# Altium PCB PCB2.PcbDoc (part 2 of 2)
Units mm, origin at the board's own origin, x right, y up, seen from the top; angles counter-clockwise.
Board outline 40 x 65 mm, 2 copper layers (Top Layer, Bottom Layer); 76 components, 45 nets, 266 pads, 528 vias.
Unrouted connection lines stored in the file: 3.
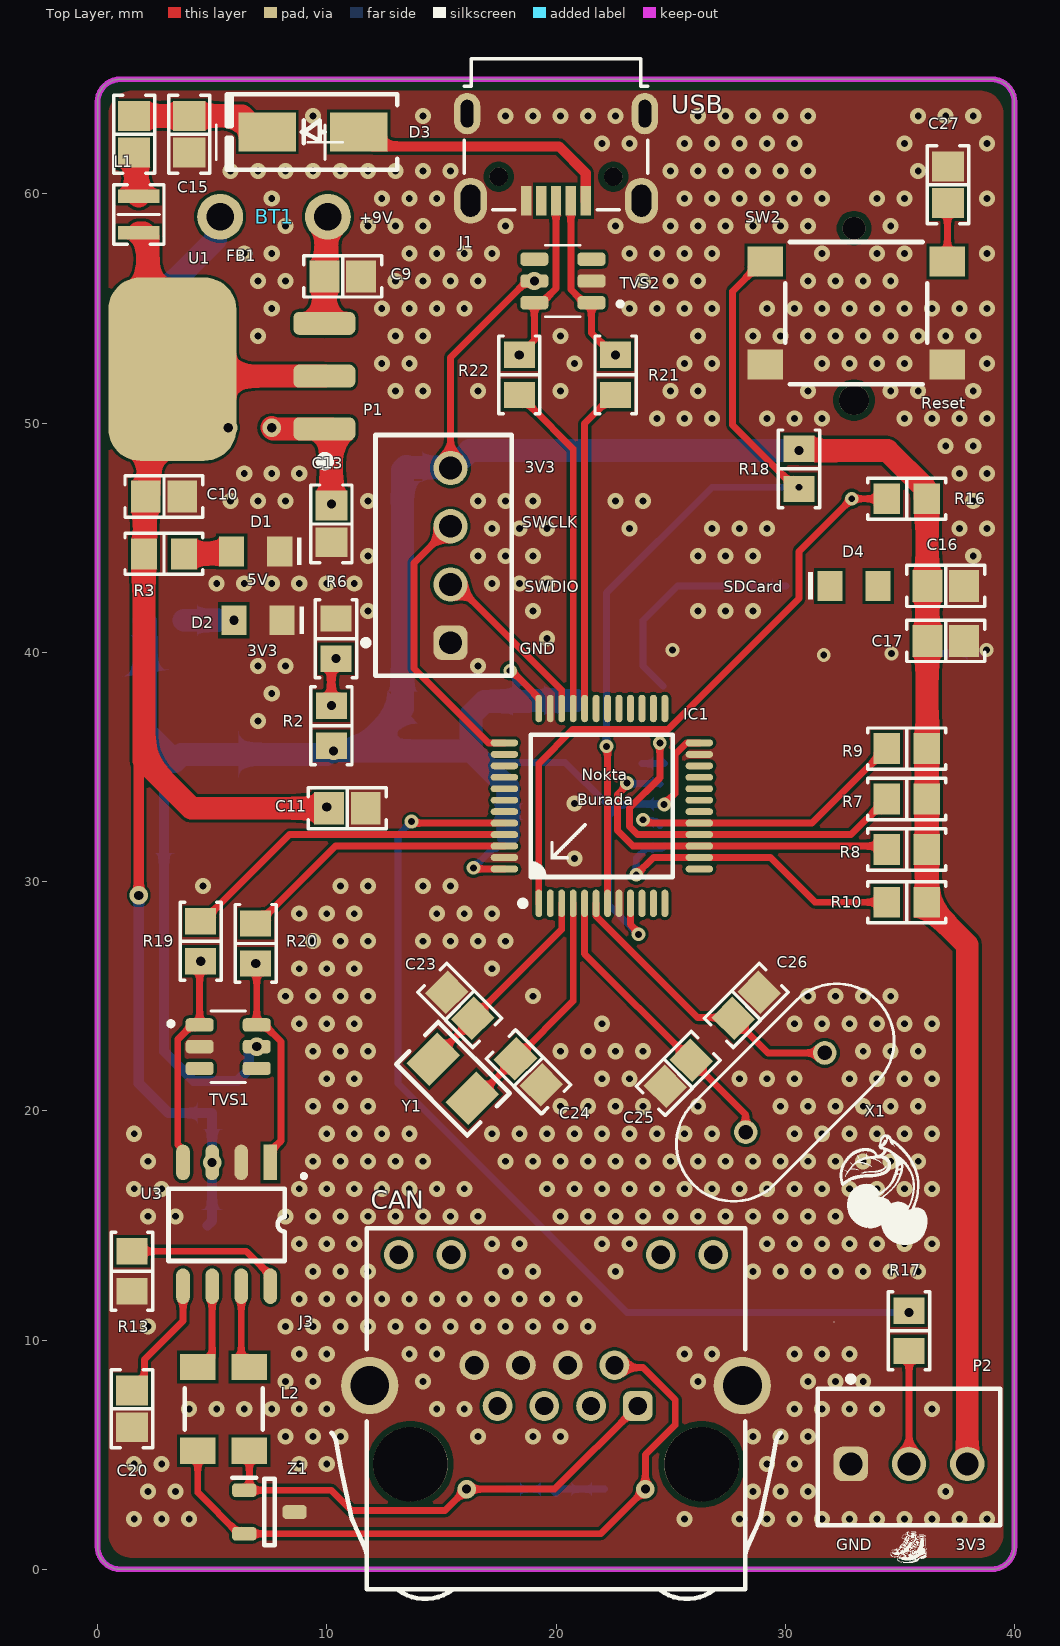
[diagram p0: Top Layer view]

## Via types
v1: diameter 0.7, hole 0.3, Top Layer to Bottom Layer, tented both sides, 492 vias
v2: diameter 0.8, hole 0.4, Top Layer to Bottom Layer, 15 vias
v3: diameter 0.6, hole 0.3, Top Layer to Bottom Layer, tented both sides, 8 vias
v4: diameter 0.6, hole 0.3, Top Layer to Bottom Layer, tented top, 5 vias
v5: diameter 0.8, hole 0.4, Top Layer to Bottom Layer, tented bottom, 4 vias
v6: diameter 0.6, hole 0.3, Top Layer to Bottom Layer, 2 vias
v7: diameter 0.6, hole 0.3, Top Layer to Bottom Layer, tented bottom, 1 vias
v8: diameter 0.8, hole 0.4, Top Layer to Bottom Layer, tented both sides, 1 vias

## Nets (pads, with @x,y where several pads share a name; then routed paths per layer and width w, separated by ;. In a path a pad name is that pad's centre, name@x,y a point inside that pad or via, vN(x,y) a via of type N, cw(c..) or ccw(c..) an arc to the next point about the centre after c; other vN are vias at no path point) (continued)
+3V3: (continued)
  Bottom Layer w0.3: v3@16.457,30.543 v3(16.4,30.6) 17.25,31.45 17.4,31.45 17.9,31.95 C1.1 ; 17,35 17.2,35.2 20.4,35.2 22.223,33.377 22.823,33.377 ; v3(18,39.2) 18,39.119 18.25,38.869 18.25,38.4 18.75,37.9 C2.2 ; v3(23.6,27.7) 22.3,29 22.3,32.854 22.823,33.377 ; v6(24.716,33.363) 24.703,33.377 22.823,33.377
  Bottom Layer w0.445: U2.4 2.9,34.783 2.9,22.6 4.2,21.3 6.1,21.3 6.6,21.8 6.6,22.455 v2(6.945,22.8)
  Bottom Layer w1: R4.2 2.1,41.325 2.1,36.509 U2.4 3.668,35.551 U2.2 ; v2(10.3,35.7) 11.45,35.7 ; C1.1 C4.2 17.9,34.15 17.75,34.3 17.7,34.3 17,35 16.3,35.7 ; C3.1 C2.2 18.764,37.864 16.886,37.864 16.3,37.279 16.3,35.7 ; v5(30.6,48.8) 16.236,48.8 15.476,48.04 P1.4 15.37,48.07 13.53,48.07 C22.1 13.45,48.1 13.3,47.95 C12.2 13.3,37.55 11.45,35.7 ; 11.45,35.7 16.024,35.7 16.3,35.7
+5V: C10.2 C11.2 C18.2 C19.1 L1.1 R1.2 R3.2 U1.2 U1.4 U2.3 U3.3 | length 62.8
  Top Layer w0.445: v8(1.8,29.4) 1.8,35.05 2.025,35.275
  Top Layer w1: L1.1 2,58.3 2.2,58.1 2.2,53.417 U1.4 ; U1.2 3.568,52.049 U1.4 ; C11.2 4.1,33.2 2.025,35.275 R3.2 2.063,44.338 2.063,46.762 C10.2 2.25,46.95 2.25,51.341 U1.4
  Bottom Layer w0.445: v8(1.8,29.4) 1.8,21.2 3.1,19.9 C18.2 5,15.2 C19.1
  other v2: 9.996,33.251 5.7,49.8
  other v5: 5,17.75
BOOT0: IC1.44 R17.2 | length 42.2
  Top Layer w0.3: v3(13.7,32.627) 13.781,32.627 13.858,32.55 IC1.44
  Bottom Layer w0.3: v3(13.7,32.627) 13.1,32.027 13.1,21.2 23.1,11.2 v5(35.4,11.2)
CAN_F_N: J3.2 L2.2 R15.2 Z1.2 | length 30.6
  Top Layer w0.3: L2.2 4.375,3.35 6.175,1.55 Z1.2 21.95,1.55 v2(23.9,3.5) 23.9,4.999 25.2,6.299 25.2,7.4 23.802,8.798 22.657,8.798 J3.2
CAN_F_P: J3.1 L2.3 R14.2 Z1.1 | length 21.2
  Top Layer w0.3: Z1.1 Z1.1@6.475,3.45 ; L2.3 6.625,3.6 Z1.1@6.475,3.45 ; J3.1 19.945,3.5 v2(16.1,3.5) 15.16,2.56 11.077,2.56 10.187,3.45 Z1.1@6.475,3.45
CAN_N: L2.1 U3.6 | length 3.9
  Top Layer w0.3: L2.1 4.575,8.825 5,9.25 U3.6
CAN_P: L2.4 U3.7 | length 3.7
  Top Layer w0.3: U3.7 6.27,9.18 L2.4
CAN_RX: C33.2 R19.2 TVS1.1 U3.4 | length 9.5
  Top Layer w0.3: U3.4 3.73,18.306 3.5,18.536 3.5,23.115 4.135,23.75 TVS1.1 4.455,26.48 v2(4.5,26.525)
CAN_RX_F: IC1.45 R19.1 | length 14.8
  Top Layer w0.3: R19.1 4.6,28.275 8.375,32.05 IC1.45
CAN_TX: C32.2 R20.2 TVS1.6 U3.1 | length 9.5
  Top Layer w0.3: v2(6.9,26.425) 6.945,26.38 TVS1.6 7.265,23.75 8,23.015 8,18.685 7.54,18.225 U3.1
CAN_TX_F: IC1.46 R20.1 | length 12.2
  Top Layer w0.3: R20.1 7,28.175 10.375,31.55 IC1.46
GND: C1.2 C2.1 C3.2 C4.1 C9.1 C10.1 C11.1 C12.1 C13.1 C14.1 C15.1 C16.1 C17.1 C18.1 C19.2 C20.1 C21.1 C22.2 C23.1 C24.1 C25.1 C26.1 C27.1 C28.1 C29.1 C30.1 C31.1 C32.1 C33.1 D1.1 D2.1 IC1.8 IC1.23 IC1.35 IC1.47 J1.5 J1.Shell J2.6 J2.10 J2.11 J3.4 J3.6 J3.8 J3.Shell J4.NEG P1.1 P2.1 R5.1 R6.1 R13.2 SW1.2 SW2.B1 SW2.B2 TVS1.2 TVS2.2 U3.2 Z1.3 | length 3.5
  Bottom Layer w0.3: 23.75,35.15 J2.6 J2.6@24.555,35.325 ; J2.11@36.56,39.95 38.63,39.95 ccw(c38.63,40.1) v4(38.78,40.1)
  other v1: 1.6,2.2 2.8,2.2 4,2.2 25.6,2.2 28,2.2 29.2,2.2 30.4,2.2 31.6,2.2 32.8,2.2 34,2.2 35.2,2.2 36.4,2.2 37.6,2.2 38.8,2.2 2.2,3.4 3.4,3.4 28.6,3.4 29.8,3.4 31,3.4 37,3.4 1.6,4.6 2.8,4.6 8.8,4.6 10,4.6 29.2,4.6 30.4,4.6 8.2,5.8 9.4,5.8 10.6,5.8 16.6,5.8 19,5.8 20.2,5.8 28.6,5.8 29.8,5.8 31,5.8 4,7 5.2,7 6.4,7 7.6,7 8.8,7 10,7 14.8,7 16,7 30.4,7 31.6,7 32.8,7 34,7 36.4,7 8.2,8.2 9.4,8.2 14.2,8.2 26.2,8.2 31,8.2 32.2,8.2 33.4,8.2 8.8,9.4 10,9.4 13.6,9.4 14.8,9.4 25.6,9.4 26.8,9.4 30.4,9.4 31.6,9.4 32.8,9.4 2.2,10.6 8.2,10.6 9.4,10.6 10.6,10.6 11.8,10.6 13,10.6 14.2,10.6 15.4,10.6 16.6,10.6 17.8,10.6 19,10.6 20.2,10.6 21.4,10.6 8.8,11.8 10,11.8 11.2,11.8 12.4,11.8 13.6,11.8 14.8,11.8 16,11.8 17.2,11.8 18.4,11.8 19.6,11.8 20.8,11.8 9.4,13 10.6,13 11.8,13 17.8,13 19,13 22.6,13 28.6,13 29.8,13 31,13 32.2,13 33.4,13 34.6,13 35.8,13 8.8,14.2 10,14.2 11.2,14.2 17.2,14.2 18.4,14.2 22,14.2 23.2,14.2 29.2,14.2 30.4,14.2 31.6,14.2 32.8,14.2 34,14.2 35.2,14.2 36.4,14.2 2.2,15.4 3.4,15.4 8.2,15.4 9.4,15.4 10.6,15.4 11.8,15.4 13,15.4 14.2,15.4 15.4,15.4 16.6,15.4 20.2,15.4 21.4,15.4 22.6,15.4 23.8,15.4 25,15.4 26.2,15.4 27.4,15.4 28.6,15.4 29.8,15.4 31,15.4 32.2,15.4 33.4,15.4 34.6,15.4 35.8,15.4 1.6,16.6 2.8,16.6 8.8,16.6 10,16.6 11.2,16.6 12.4,16.6 13.6,16.6 14.8,16.6 16,16.6 19.6,16.6 20.8,16.6 22,16.6 23.2,16.6 24.4,16.6 25.6,16.6 26.8,16.6 28,16.6 29.2,16.6 30.4,16.6 31.6,16.6 32.8,16.6 34,16.6 35.2,16.6 36.4,16.6 2.2,17.8 9.4,17.8 10.6,17.8 11.8,17.8 13,17.8 14.2,17.8 17.8,17.8 19,17.8 20.2,17.8 21.4,17.8 22.6,17.8 23.8,17.8 25,17.8 26.2,17.8 27.4,17.8 28.6,17.8 29.8,17.8 31,17.8 32.2,17.8 33.4,17.8 34.6,17.8 35.8,17.8 1.6,19 10,19 11.2,19 12.4,19 13.6,19 17.2,19 18.4,19 19.6,19 20.8,19 22,19 23.2,19 24.4,19 25.6,19 26.8,19 30.4,19 31.6,19 32.8,19 34,19 35.2,19 36.4,19 9.4,20.2 10.6,20.2 11.8,20.2 20.2,20.2 21.4,20.2 22.6,20.2 23.8,20.2 26.2,20.2 29.8,20.2 31,20.2 32.2,20.2 33.4,20.2 34.6,20.2 35.8,20.2 10,21.4 11.2,21.4 22,21.4 23.2,21.4 28,21.4 29.2,21.4 30.4,21.4 32.8,21.4 34,21.4 35.2,21.4 36.4,21.4 9.4,22.6 10.6,22.6 11.8,22.6 20.2,22.6 21.4,22.6 22.6,22.6 23.8,22.6 33.4,22.6 34.6,22.6 35.8,22.6 8.8,23.8 10,23.8 11.2,23.8 22,23.8 30.4,23.8 31.6,23.8 32.8,23.8 34,23.8 35.2,23.8 36.4,23.8 8.2,25 9.4,25 10.6,25 11.8,25 19,25 31,25 32.2,25 33.4,25 34.6,25 8.8,26.2 10,26.2 11.2,26.2 17.2,26.2 9.4,27.4 10.6,27.4 11.8,27.4 14.2,27.4 15.4,27.4 16.6,27.4 17.8,27.4 8.8,28.6 10,28.6 11.2,28.6 14.8,28.6 16,28.6 17.2,28.6 4.6,29.8 10.6,29.8 11.8,29.8 14.2,29.8 15.4,29.8 20.8,31 20.8,33.4 7,37 7.6,38.2 7,39.4 8.2,39.4 16.6,39.4 19.6,40.6 11.8,41.8 19,41.8 26.2,41.8 27.4,41.8 28.6,41.8 5.2,43 6.4,43 7.6,43 8.8,43 10,43 11.2,43 17.2,43 18.4,43 19.6,43 11.8,44.2 16.6,44.2 17.8,44.2 19,44.2 26.2,44.2 27.4,44.2 28.6,44.2 38.2,44.2 17.2,45.4 18.4,45.4 19.6,45.4 23.2,45.4 26.8,45.4 28,45.4 29.2,45.4 37.6,45.4 38.8,45.4 5.8,46.6 7,46.6 8.2,46.6 11.8,46.6 16.6,46.6 17.8,46.6 19,46.6 22.6,46.6 23.8,46.6 38.2,46.6 6.4,47.8 7.6,47.8 8.8,47.8 37.6,47.8 38.8,47.8 37,49 38.2,49 24.4,50.2 25.6,50.2 26.8,50.2 29.2,50.2 30.4,50.2 31.6,50.2 35.2,50.2 36.4,50.2 37.6,50.2 38.8,50.2 13,51.4 14.2,51.4 16.6,51.4 20.2,51.4 25,51.4 26.2,51.4 31,51.4 34.6,51.4 35.8,51.4 38.2,51.4 12.4,52.6 13.6,52.6 20.8,52.6 25.6,52.6 26.8,52.6 31.6,52.6 32.8,52.6 34,52.6 35.2,52.6 38.8,52.6 7,53.8 13,53.8 14.2,53.8 20.2,53.8 26.2,53.8 28.6,53.8 29.8,53.8 31,53.8 32.2,53.8 33.4,53.8 34.6,53.8 35.8,53.8 37,53.8 38.2,53.8 7.6,55 12.4,55 13.6,55 14.8,55 16,55 23.2,55 24.4,55 25.6,55 26.8,55 29.2,55 30.4,55 31.6,55 32.8,55 34,55 35.2,55 36.4,55 37.6,55 38.8,55 7,56.2 8.2,56.2 13,56.2 14.2,56.2 15.4,56.2 16.6,56.2 23.8,56.2 25,56.2 26.2,56.2 31,56.2 32.2,56.2 33.4,56.2 34.6,56.2 6.4,57.4 7.6,57.4 13.6,57.4 14.8,57.4 16,57.4 17.2,57.4 23.2,57.4 24.4,57.4 25.6,57.4 26.8,57.4 31.6,57.4 34,57.4 35.2,57.4 38.8,57.4 8.2,58.6 11.8,58.6 13,58.6 14.2,58.6 17.8,58.6 22.6,58.6 25,58.6 26.2,58.6 27.4,58.6 28.6,58.6 29.8,58.6 31,58.6 34.6,58.6 7.6,59.8 12.4,59.8 13.6,59.8 14.8,59.8 25.6,59.8 26.8,59.8 28,59.8 29.2,59.8 30.4,59.8 31.6,59.8 34,59.8 35.2,59.8 38.8,59.8 5.8,61 7,61 8.2,61 9.4,61 10.6,61 11.8,61 13,61 14.2,61 15.4,61 25,61 26.2,61 27.4,61 28.6,61 29.8,61 31,61 35.8,61 22,62.2 23.2,62.2 25.6,62.2 26.8,62.2 28,62.2 29.2,62.2 30.4,62.2 35.2,62.2 38.8,62.2 9.4,63.4 14.2,63.4 17.8,63.4 19,63.4 20.2,63.4 21.4,63.4 22.6,63.4 26.2,63.4 27.4,63.4 28.6,63.4 29.8,63.4 31,63.4 35.8,63.4 37,63.4 38.2,63.4
  other v4: 31.68,39.89 34.63,39.95 25.08,40.1
NetBT1_N: BT1.N SW1.1 | length 5.2
  Bottom Layer w1: SW1.1 2.6,55.45 5.159,58.009 5.159,58.809 BT1.N
NetBT1_P: BT1.P C9.2 U1.3 | length 4.7
  Top Layer w1: U1.3 9.898,54.349 9.898,56.398 C9.2 9.975,56.475 9.975,58.925 BT1.P
NetC13_2: C13.2 R1.1 R5.2 U1.1 | length 6
  Top Layer w1: v2(7.6,49.8) 7.651,49.749 U1.1 10.2,49.749 C13.2
  other v2: 10.2,46.475
NetC14_2: C14.2 R2.1 R6.2 U2.1 | length 2.1
  Top Layer w0.381: v2(10.2,37.675) 10.2,39.525 v2(10.4,39.725)
NetC15_2: C15.2 D3.2 FB1.2 | length 6.9
  Top Layer w0.445: D3.2@6.8,63.3 D3.2
  Top Layer w1: FB1.2 C15.2 6.3,63.4 7,62.7 D3.2
NetC20_2: C20.2 U3.5 | length 5.5
  Top Layer w0.3: C20.2 1.55,7.8 2.05,8.3 2.05,9.15 3.73,10.83 U3.5
NetC21_2: C21.2 R14.1 R15.1 | length 4.4
  Bottom Layer w0.3: R14.1 19.8,3.5 C21.2 20.2,3.5 R15.1
NetC27_2: C27.2 SW2.A2 | length 2.6
  Top Layer w0.3: SW2.A2 37.075,59.575 C27.2
NetD1_2: D1.2 R3.1 | length 2.1
  Top Layer w1: R3.1 5.8,44.3 5.85,44.35 D1.2
NetD2_2: D2.2 R4.1 | length 2.2
  Bottom Layer w1: R4.1 v5(5.95,41.4)
NetD3_1: D3.1 J1.1 | length 11.8
  Top Layer w0.445: D3.1 12.028,62.072 20.128,62.072 21.3,60.9 J1.1
NetD4_2: D4.2 R12.2
NetFB1_1: FB1.1 L1.2 | length 2
  Top Layer w1: FB1.1 1.7,61.7 1.7,60 L1.2
NetJ2_2: IC1.14 J2.2 R10.1 | length 14.1
  Top Layer w0.3: v3(23.5,30.3) 24.25,31.05 IC1.14 29.35,31.05 31.3,29.1 R10.1@34.325,29.1
  Bottom Layer w0.3: v3(23.5,30.3) 23.5,31 23.959,31.459 24.639,31.459 J2.2
NetJ2_3: IC1.17 J2.3 R9.1 | length 12.9
  Top Layer w0.3: v3(23.8,32.7) 23.881,32.7 24.031,32.55 IC1.17 31.175,32.55 33.9,35.275 34,35.275 34.425,35.7 R9.1
  Bottom Layer w0.3: v3(23.8,32.7) 23.881,32.7 23.956,32.625 24.38,32.625 24.53,32.475 J2.3@24.53,32.45
NetJ2_5: IC1.15 J2.5 R8.1 | length 15.7
  Top Layer w0.3: v3(23.1,34.3) 23.1,34.219 22.677,33.796 22.677,32.223 23.35,31.55 IC1.15 34.175,31.55 R8.1@34.325,31.4
  Bottom Layer w0.3: v3(23.1,34.3) 23.125,34.275 24.505,34.275 J2.5@24.53,34.25
NetJ2_7: IC1.16 J2.7 R7.1 | length 16.2
  Top Layer w0.3: v6(24.53,36.05) 24.53,34.53 23.2,33.2 23.2,32.4 23.55,32.05 IC1.16 32.875,32.05 34.325,33.5 R7.1@34.325,33.6
NetJ2_9: J2.9 R11.2 | length 10.1
  Bottom Layer w0.3: J2.9 23.8,39.4 23.8,41.4 25.3,42.9 R11.2
NetP2_2: P2.2 R17.1 | length 4.9
  Top Layer w0.3: P2.2 R17.1
NetR13_1: R13.1 U3.8 | length 6.9
  Top Layer w0.3: R13.1 6.49,13.875 7.54,12.825 U3.8
NRST: IC1.7 R18.1 SW2.A1 | length 35.7
  Top Layer w0.3: v3(22.2,35.9) 22.25,35.85 IC1.7 ; SW2.A1 29,57.05 27.7,55.75 27.7,49.925 30.5,47.125 R18.1
  Bottom Layer w0.3: v3(22.2,35.9) 22.2,42.6 26.8,47.2 v7(30.6,47.2)
PC14/OSC32_IN: C23.2 IC1.3 Y1.1 | length 9.1
  Top Layer w0.3: Y1.1 16.366,23.963 C23.2 20.25,27.919 IC1.3
PC15/OSC32_OUT: C24.2 IC1.4 Y1.2 | length 10.4
  Top Layer w0.3: Y1.2 16.52,20.551 C24.2 20.75,24.781 IC1.4
PD0/OSC_IN: C25.2 IC1.5 X1.1 | length 12.9
  Top Layer w0.3: IC1.5 21.25,26.85 C25.2 28.268,19.832 28.268,19.082 X1.1
PD1/OSC_OUT: C26.2 IC1.6 X1.2 | length 13
  Top Layer w0.3: IC1.6 21.75,28.496 26.176,24.07 27.699,24.07 C26.2 29.243,22.525 X1.2
SD_CardD: D4.1 R11.1
SWCLK: IC1.37 P1.3 | length 12.2
  Top Layer w0.3: P1.3 13.8,43.9 13.8,39.3 17.05,36.05 IC1.37
SWDIO: IC1.34 P1.2 | length 7.6
  Top Layer w0.3: P1.2 15.64,42.96 20.25,38.35 IC1.34
USB_DM: C31.2 J1.2 R21.2 TVS2.1 | length 7.8
  Top Layer w0.3: J1.2 20.65,55.825 21.225,55.25 TVS2.1 21.545,53.93 22.5,52.975 v2(22.6,52.975)
USB_DM_F: IC1.32 R21.1 | length 14.3
  Top Layer w0.3: IC1.32 21.25,49.975 22.5,51.225 R21.1
USB_DP: C30.2 J1.3 R22.2 TVS2.6 | length 7.6
  Top Layer w0.3: v2(18.4,52.975) 18.5,52.975 18.925,53.4 18.925,53.5 19.055,53.63 TVS2.6 19.375,55.25 20,55.875 J1.3
USB_DP_F: IC1.33 R22.1 | length 14.7
  Top Layer w0.3: R22.1 18.5,51.225 18.925,50.8 18.925,50.7 20.75,48.875 IC1.33
VBAT: IC1.1 J4.POS R16.2 | length 27.3
  Top Layer w0.3: IC1.1 19.25,35.15 20.727,36.627 24.881,36.627 30.6,42.346 30.6,44.4 v4(32.9,46.7) R16.2
pads on no net: IC1.2 IC1.10 IC1.11 IC1.12 IC1.13 IC1.18 IC1.19 IC1.20 IC1.21 IC1.22 IC1.25 IC1.26 IC1.27 IC1.28 IC1.29 IC1.30 IC1.31 IC1.38 IC1.39 IC1.40 IC1.41 IC1.42 IC1.43 J1.4 J1.MH1 J1.MH2 J2.1 J2.8 J3.3 J3.5 J3.7 J3.9 J3.10 J3.11 J3.12 J3.M1 J3.M2 J4.None TVS1.3 TVS1.4 TVS2.3 TVS2.4

## Polygon pours and split planes (outlines as drawn)
GND on Top Layer "NONET_L03_P-001" (solid, pour order 0): 1.5,64.5 ccw(c1.5,63.5) 0.5,63.5 0.5,1.5 ccw(c1.5,1.5) 1.5,0.5 38.5,0.5 ccw(c38.5,1.5) 39.5,1.5 39.5,63.5 ccw(c38.5,63.5) 38.5,64.5
GND on Bottom Layer "NONET_L03_P-001" (solid, pour order 2): 1.5,64.5 ccw(c1.5,63.5) 0.5,63.5 0.5,1.5 ccw(c1.5,1.5) 1.5,0.5 38.5,0.5 ccw(c38.5,1.5) 39.5,1.5 39.5,25.5 ccw(c38.5,25.5) 38.5,26.5 25,26.5 cw(c25,27.5) 24,27.5 24,40 cw(c25,40) 25,41 38.4,41 ccw(c38.4,42.1) 39.5,42.1 39.5,63.3 ccw(c38.3,63.3) 38.3,64.5

## Keep-outs
Keep-Out Layer:
  the board outline again, w0.254

## Silkscreen, mask and mechanical layers (free items; w line width, h text height)
Top Overlay:
  drawing of 8 lines, arcs and shapes, not listed
  text "USB" at 25.034,63.527 h0.8
  text "+9V" at 11.427,58.727 h0.5
  text "Reset" at 35.927,50.627 h0.5
  text "3V3" at 18.627,47.827 h0.5
  text "SWCLK" at 18.527,45.427 h0.5
  text "5V" at 6.527,42.927 h0.5
  text "SWDIO" at 18.627,42.627 h0.5
  text "SDCard" at 27.327,42.627 h0.5
  text "GND" at 18.427,39.927 h0.5
  text "3V3" at 6.527,39.827 h0.5
  text "Nokta" at 21.127,34.427 h0.5
  text "Burada" at 20.927,33.327 h0.5
  text "CAN" at 11.927,15.727 h0.8
  text "GND" at 32.227,0.827 h0.5
  text "3V3" at 37.427,0.827 h0.5
Bottom Overlay:
  drawing of 2 lines, arcs and shapes, not listed
  text "suBardagi" at 8.973,2.094 h0.8

## Text inside footprints (layer, text, board x,y; h text height)
J1: Top Courtyard "PCB Edge" at 21.3,65.9 h0.41 r180
J2: Bottom Courtyard "Prohibited area" at 32.6,38.2 h1.02 r90
J4: Bottom Overlay "+" at 33.82,44.51 h1.88 r90; Bottom Overlay "-" at 33.77,66.14 h1.88 r90
SW1: Bottom Overlay "ON" at 1.8,48.8 h0.89 r180; Bottom Component Outline "ON" at 1.8,48.8 h0.89 r180